# Altium PCB PCB1.PcbDoc
Units mil, origin at the board's own origin, x right, y up, seen from the top; angles counter-clockwise.
Board outline 900 x 2400 mil, 2 copper layers (Top Layer, Bottom Layer); 11 components, 13 nets, 90 pads, 0 vias.
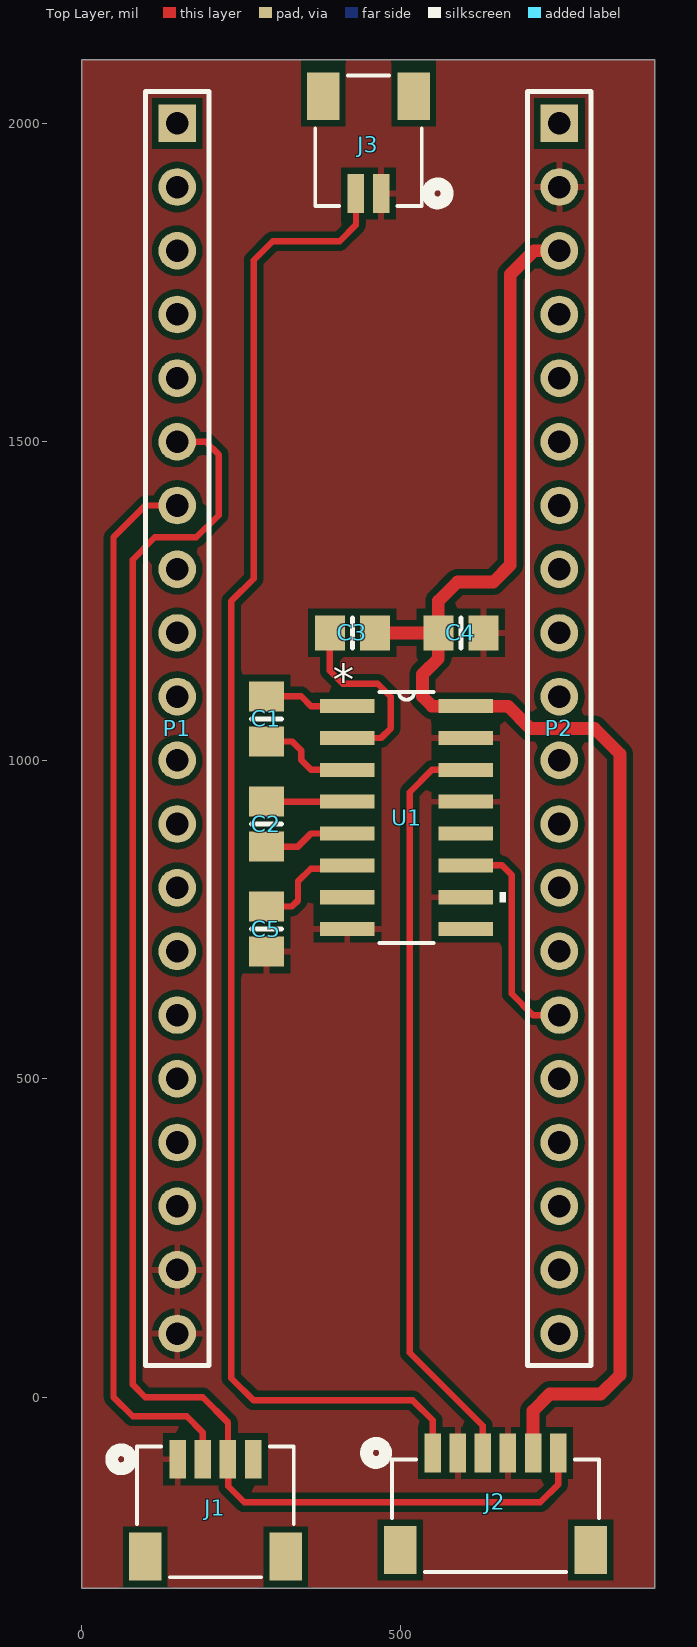
[diagram p0: Top Layer view]
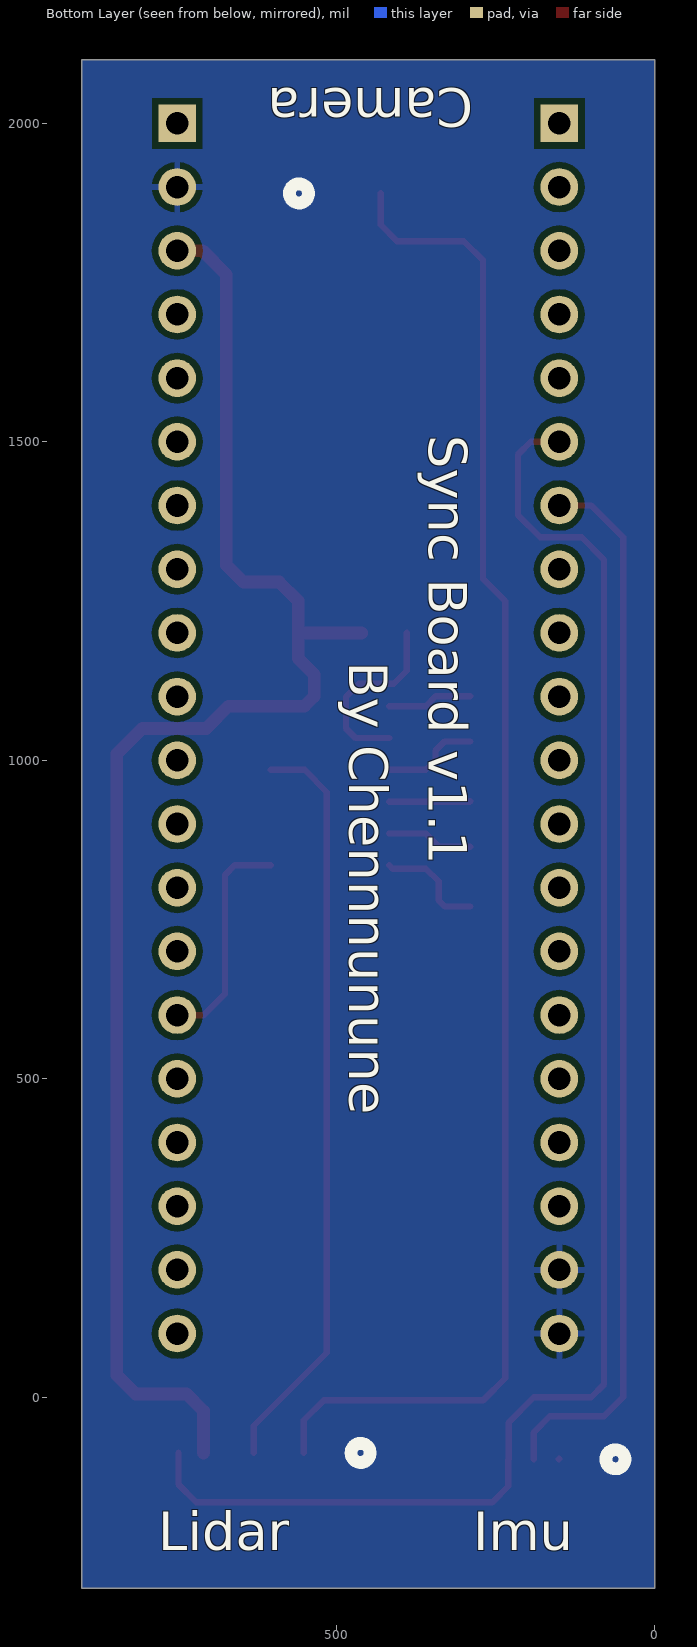
[diagram p1: Bottom Layer view, seen from below]

## Layer stack, top to bottom
Top Solder: solder mask 0.4, Solder Resist, Dk 3.5
Top Layer: signal copper 1.4
Dielectric 1: dielectric 12.6, FR-4, Dk 4.8
Bottom Layer: signal copper 1.4
Bottom Solder: solder mask 0.4, Solder Resist, Dk 3.5

## Board outline
0,-300 0,2100 900,2100 900,-300

## Design rules (kind name [scope] priority, off if disabled: settings)
Clearance [All] p1: gap=10 ignorepadtopadclearanceinfootprint=FALSE except(0: Arc-Hole Track-Hole SMDPad-Hole THPad-Hole Via-Hole Fill-Hole Poly-Hole Region-Hole Text-Hole)
PolygonConnect [All] p1: connectstyle=Relief reliefconductorwidth=10 reliefentries=4 polygonreliefangle="90 Angle" airgapwidth=10
RoutingVias [All] p1: holewidth=28 width=50 viastyle="Through Hole" minholewidth=28 minwidth=50 maxholewidth=28 maxwidth=50
SilkToSolderMaskClearance [IsPad] p1 off: minsilkscreentomaskgap=10 clearancetoexposedcopper=TRUE
SolderMaskExpansion [All] p1: expansion=4
Width [All] p1: maxlimit=30 minlimit=10 preferedwidth=10 bottomlayer_maxwidth=10 minimp=50.000000 maximp=50.000000 favimp=50.000000
29 further rules are at their usual default settings.

## Components (designator, comment, footprint, x,y, rotation, side; value= is the part's Value field where it differs from the comment)
C1 "Cap" 6-0805_N 290,1065 r270 top locked value=0.1uF
C2 "Cap" 6-0805_N 290,900 r270 top locked value=0.1uF
C3 "Cap" 6-0805_N 425,1200 r180 top locked value=0.1uF
C4 "Cap" 6-0805_N 595.43,1200 r180 top locked value=0.1uF
C5 "Cap" 6-0805_N 290,735 r270 top locked value=0.1uF
J1 "MTI-300" CONN_SM04B-SRSS-TB_JST 210,-180 r180 top locked
J2 "SM06B-SRSS-TB" CONN_SM06B-SRSS-TB_JST 649.61,-186.07 r0 top locked
J3 "SM02B-SRSS-TB" CONN_SM02B-SRSS-TB_JST 450.32,1972.62 r0 top locked
P1 "Header 20" HDR1X20 150,2000 r270 top locked
P2 "Header 20" HDR1X20 750,2000 r270 top locked
U1 "MAX232D" D16 510,910 r0 top locked

## Footprints (in the part's own frame and the unit in brackets; to place one, negate y for a bottom-side part, rotate by r counter-clockwise, add the part's x,y. Pads: shape width x height; smd on the part's side, far side on the other; paste and mask are expansions set on the pad)
6-0805_N [mm] "Chip Resistor, Body 2.0x1.2mm, IPC Medium Density"
  rect 1.2x1.4 smd: 1(-0.9,0) 2(0.9,0)
  silkscreen extent 0,-0.6 0,0.6, body extent -1.07,-0.7 1.07,0.7, height 0.7
CONN_SM02B-SRSS-TB_JST [mil]
  rect 26x61 smd paste+0 mask+0: 1(19.68,-82.62) 2(-19.68,-82.62)
  rect 51x75 on Top Solder paste+0 mask-37.5: 3(-70.87,69.94) 4(70.87,69.94)
  rect 51x75 smd paste+0 mask-37.5: 3(-70.87,69.94) 4(70.87,69.94)
  silkscreen extent -84,-102 124,102
CONN_SM04B-SRSS-TB_JST [mil]
  rect 26x61 smd paste+0 mask+0: 1(59.06,-82.62) 2(19.68,-82.62) 3(-19.68,-82.62) 4(-59.06,-82.62)
  rect 51x75 on Top Solder paste+0 mask-37.5: 5(-110.24,69.94) 6(110.24,69.94)
  rect 51x75 smd paste+0 mask-37.5: 5(-110.24,69.94) 6(110.24,69.94)
  silkscreen extent -123,-103 163,103
CONN_SM06B-SRSS-TB_JST [mil]
  rect 26x61 smd paste+0 mask+0: 1(-98.43,98.69) 2(-59.06,98.69) 3(-19.68,98.69) 4(19.68,98.69) 5(59.06,98.69) 6(98.43,98.69)
  rect 51x75 on Top Solder paste-37.5 mask-37.5: 7(-150,-55) 8(150,-55)
  rect 51x75 smd paste-37.5 mask-37.5: 7(-149.61,-53.87) 8(149.61,-53.87)
  silkscreen extent -202,-88 162,114
D16 [mil]
  rect 86x22 smd paste-43 mask-43: 1(-93,175) 2(-93,125) 3(-93,75) 4(-93,25) 5(-93,-25) 6(-93,-75) 7(-93,-125) 8(-93,-175) 9(93,-175) 10(93,-125) 11(93,-75) 12(93,-25) 13(93,25) 14(93,75) 15(93,125) 16(93,175)
  silkscreen extent -43,-197 156,197, body extent -122,-197 122,197, height 69
HDR1X20 [mm] "Connector; Header; 20 Position"
  rect 1.5x1.5 hole 0.9: 1(0,0)
  round 1.5 hole 0.9: 2(2.54,0) 3(5.08,0) 4(7.62,0) 5(10.16,0) 6(12.7,0) 7(15.24,0) 8(17.78,0) 9(20.32,0) 10(22.86,0) 11(25.4,0) 12(27.94,0) 13(30.48,0) 14(33.02,0) 15(35.56,0) 16(38.1,0) 17(40.64,0) 18(43.18,0) 19(45.72,0) 20(48.26,0)
  silkscreen extent -1.27,-1.27 49.53,1.27

## Part data
C1 C2 C3 C4 C5: "Capacitor", LatestRevisionDate=17-Jul-2002, LatestRevisionNote="Re-released for DXP Platform.", PackageDescription="Radial Cap, Thru-Hole; 2 Leads; 0.3 in Pin Spacing", PackageReference=RAD-0.3, Published=8-Jun-2000, Publisher="Altium Limited"
J1: library part SM04B-SRSS-TB, "No Description Available", Mfr_Name=JST, RefDes=RefDes, Type=Type
J2: library part SM06B-SRSS-TBLFSN, "No Description Available", Mfr_Name=JST, RefDes=RefDes, Type=Type
J3: "No Description Available", Mfr_Name=JST, RefDes=RefDes, Type=Type
P1 P2: "Header, 20-Pin", LatestRevisionDate=17-Jul-2002, LatestRevisionNote="Re-released for DXP Platform.", Publisher="Altium Limited"
U1: "No Description Available", Mfr_Name="Texas Instruments", RefDes=RefDes, Type=Type

## Nets (pads, with @x,y where several pads share a name; then routed paths per layer and width w, separated by ;. In a path a pad name is that pad's centre, name@x,y a point inside that pad or via, vN(x,y) a via of type N, cw(c..) or ccw(c..) an arc to the next point about the centre after c; other vN are vias at no path point)
+5: C3.1 C4.2 J2.5 P2.3 U1.16 | length 2493.1
  Top Layer w20: C3.1 C4.2 ; J2.5 708.66,-21.34 735,5 815,5 845,35 845,1010 805,1050 704.29,1050 669.29,1085 U1.16 550,1085 535,1100 535,1135 560,1160 C4.2 ; P2.3 710,1800 672.9,1762.9 672.9,1306.55 646.35,1280 590,1280 560,1250 C4.2
CAMERA_GPIO_IN: J2.1 J3.2 | length 2397.3
  Top Layer w10: J3.2 430.63,1840.63 405,1815 300,1815 270,1785 270,1285 235,1250 235,30 270,-5 520,-5 551.18,-36.18 J2.1
GND: C4.1 C5.2 J1.1 J2.2 J2.4 J3.1 P1.19 P1.20 P2.2 U1.8 U1.10 U1.13 U1.15 | length 16.8
  Top Layer w10: J1.1@150,-96.44 J1.1 ; P1.20 P1.20@150.94,99.06 ; P2.2@740,1890 P2.2
GPS_GPRMC_RS232: J2.3 U1.14 | length 1187.5
  Top Layer w10: U1.14 550,985 515,950 515,70 629.92,-44.92 J2.3
GPS_GPRMC_TTL: P2.15 U1.11 | length 353.5
  Top Layer w10: U1.11 660,835 675,820 675,633.66 708.66,600 P2.15
GPS_PPS: J1.3 J2.6 P1.6 | length 2491.7
  Top Layer w10: P1.6 195,1500 215,1480 215,1385 180,1350 115,1350 80,1315 80,20 100,0 190,0 229.68,-39.68 J1.3 230,-97.7 230,-140 255,-165 720,-165 748.03,-136.97 J2.6
ImuSyncIn: J1.2 P1.7 | length 1676
  Top Layer w10: P1.7 100,1400 50,1350 50,0 80,-30 165,-30 190.32,-55.32 J1.2
NetC1_1: C1.1 U1.1 | length 133.4
  Top Layer w10: C1.1 344.57,1100.43 360,1085 U1.1
NetC1_2: C1.2 U1.3 | length 154.2
  Top Layer w10: C1.2 330.43,1029.57 344.57,1015.43 344.57,1000.43 360,985 U1.3
NetC2_1: C2.1 U1.4 | length 127.2
  Top Layer w10: C2.1 290.43,935 U1.4
NetC2_2: C2.2 U1.5 | length 135.5
  Top Layer w10: C2.2 339.57,864.57 360,885 U1.5
NetC3_2: C3.2 U1.2 | length 296
  Top Layer w10: C3.2 389.57,1140.43 410,1120 465,1120 485,1100 485,1050 470,1035 U1.2
NetC5_1: C5.1 U1.6 | length 171.3
  Top Layer w10: C5.1 330,770.43 339.57,780 339.57,810 359.57,830 412,830 U1.6
pads on no net: J1.4 J1.5 J1.6 J2.7 J2.8 J3.3 J3.4 P1.1 P1.2 P1.3 P1.4 P1.5 P1.8 P1.9 P1.10 P1.11 P1.12 P1.13 P1.14 P1.15 P1.16 P1.17 P1.18 P2.1 P2.4 P2.5 P2.6 P2.7 P2.8 P2.9 P2.10 P2.11 P2.12 P2.13 P2.14 P2.16 P2.17 P2.18 P2.19 P2.20 U1.7 U1.9 U1.12

## Polygon pours and split planes (outlines as drawn)
GND on Top Layer "Top Layer-GND" (solid, remove dead copper, pour order 0): 0,2100 0,-300 900,-300 900,2100
GND on Bottom Layer "Bottom Layer-GND" (solid, pour order 2): 0,2100 0,-300 900,-300 900,2100

## Silkscreen, mask and mechanical layers (free items; w line width, h text height)
Bottom Overlay:
  text "Camera" at 285,2055 h60 r180
  text "Sync Board v1.1" at 355,1510 h60 r90
  text "By Chennnunune" at 480,1155 h60 r90
  text "Imu" at 285,-240 h60
  text "Lidar" at 780,-240 h60
Mechanical 1:
  the board outline again, w10

## Text inside footprints (layer, text, board x,y; h text height)
U1: Top Overlay "*" at 394.5,1102 h50; Mechanical 13 "*" at 394.5,1102 h50